# Altium PCB REL_IRF_MEZ_v2.PcbDoc
Units mm, origin at the board's own origin, x right, y up, seen from the top; angles counter-clockwise.
Board outline 27.97 x 22.89 mm, 2 copper layers (Top Layer, Bottom Layer); 9 components, 20 nets, 46 pads, 0 vias.
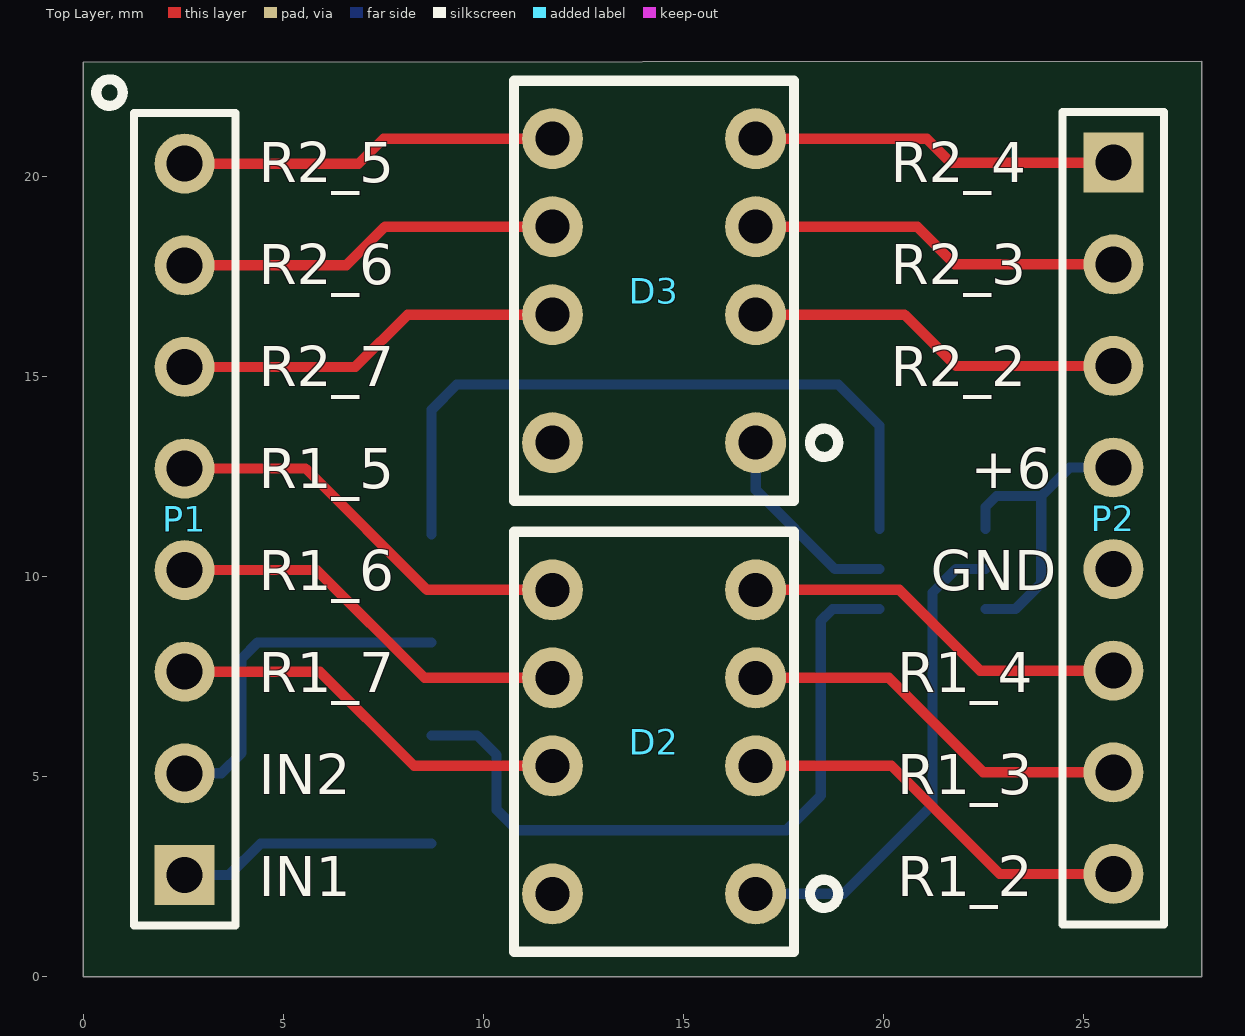
[diagram p0: Top Layer view]
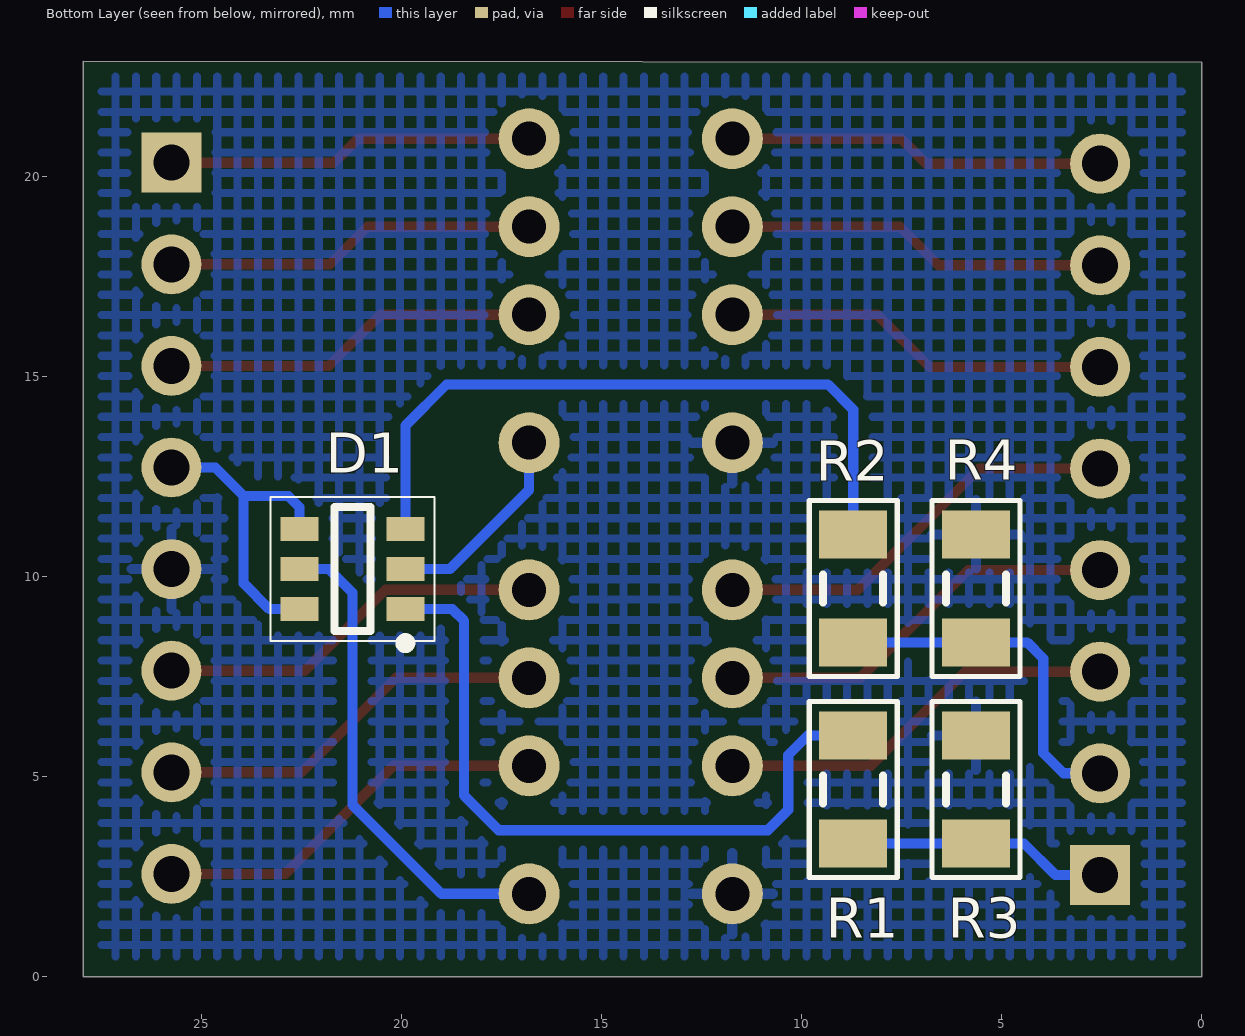
[diagram p1: Bottom Layer view, seen from below]
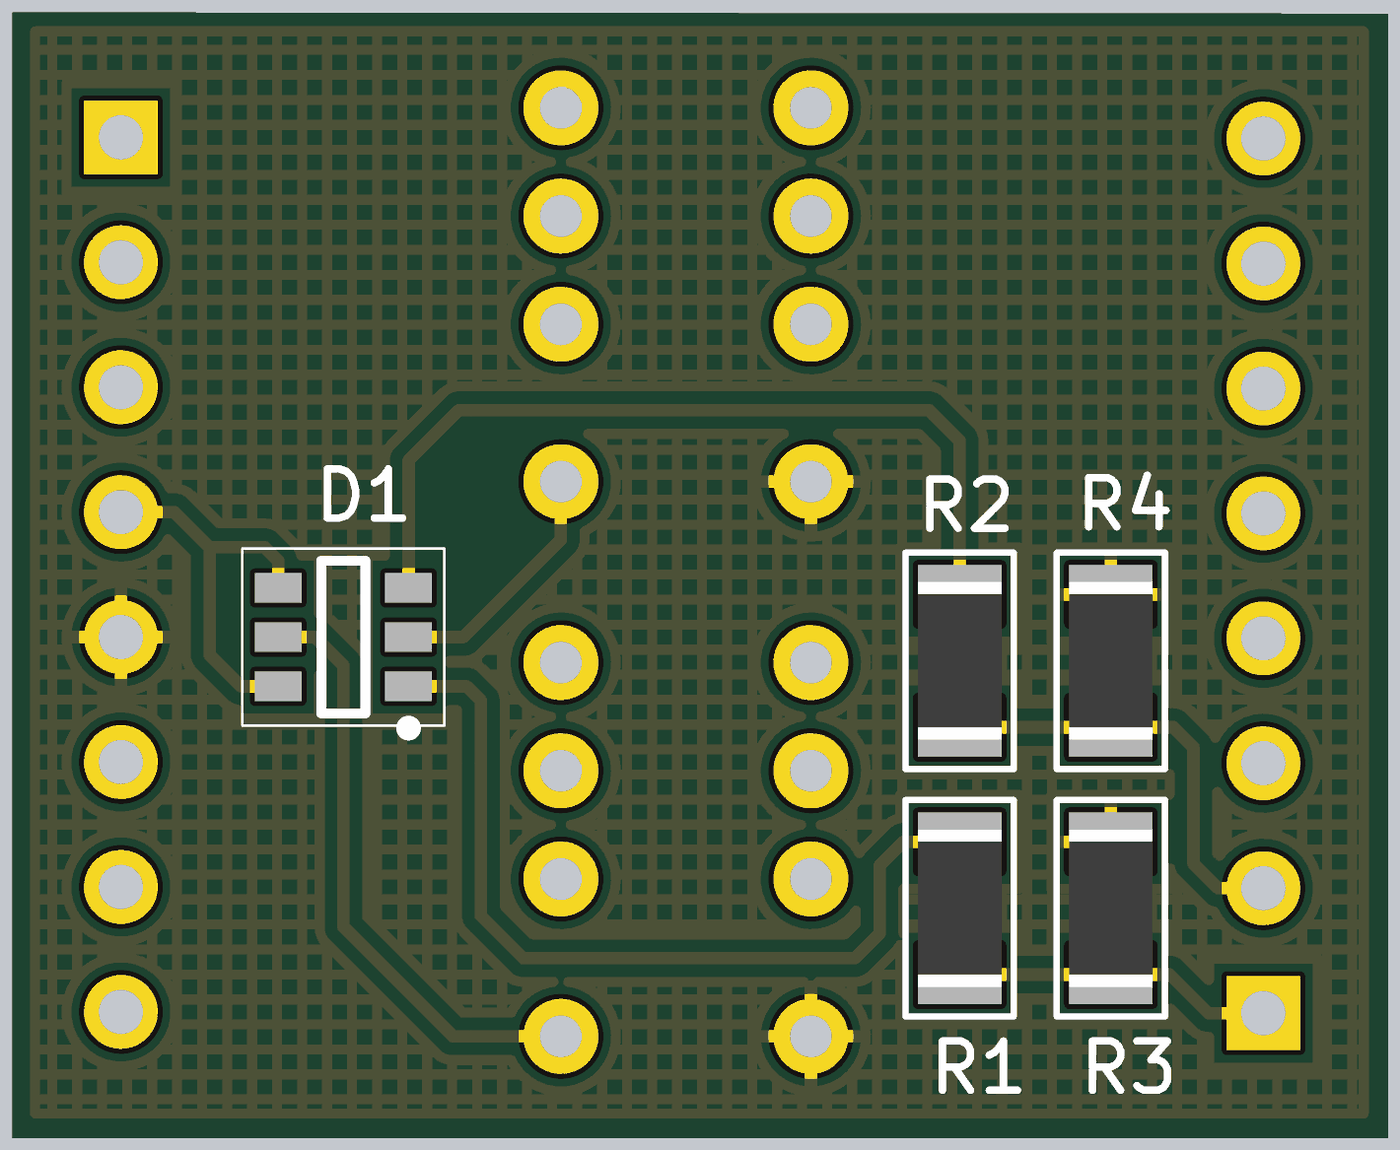
[diagram p2: 3D render of the assembled board from below, using the file's embedded part models]

## Layer stack, top to bottom
Top Solder: solder mask 0.0102, Solder Resist, Dk 3.5
Top Layer: signal copper 0.0356
Dielectric 1: dielectric 0.32, FR-4, Dk 4.8
Bottom Layer: signal copper 0.0356
Bottom Solder: solder mask 0.0102, Solder Resist, Dk 3.5

## Board outline
0,22.86 0,0 27.965,0 27.965,22.885

## Design rules (kind name [scope] priority, off if disabled: settings)
Clearance [All] p1: gap=0.254 ignorepadtopadclearanceinfootprint=FALSE except(0: Arc-Hole Track-Hole SMDPad-Hole THPad-Hole Via-Hole Fill-Hole Poly-Hole Region-Hole Text-Hole)
PolygonConnect [All] p1: connectstyle=Relief reliefconductorwidth=0.254 reliefentries=4 polygonreliefangle="90 Angle" airgapwidth=0.254
RoutingVias [All] p1: holewidth=0.711 width=1.27 viastyle="Through Hole" minholewidth=0.711 minwidth=1.27 maxholewidth=0.711 maxwidth=1.27
SolderMaskExpansion [All] p1: expansion=0.102
Width [All] p1: maxlimit=0.254 minlimit=0.254 preferedwidth=0.254
30 further rules are at their usual default settings.

## Components (designator, comment, footprint, x,y, rotation, side; value= is the part's Value field where it differs from the comment)
D1 "IRF5852PbF" IRF5852PbF 21.234,10.185 r0 bottom
D2 "HFD4 (IM03TS)" "HFD4 (IM03TS)" 14.275,5.867 r90 top
D3 "HFD4 (IM03TS)" "HFD4 (IM03TS)" 14.275,17.145 r90 top
P1 "Header 8" HDR1X8 2.54,2.54 r90 top
P2 "Header 8" HDR1X8 25.756,20.345 r270 top
R1 "240" RES_1206 8.712,4.674 r90 bottom
R2 "240" RES_1206 8.712,9.703 r90 bottom
R3 "1М" RES_1206 5.639,4.674 r90 bottom
R4 "1М" RES_1206 5.639,9.703 r270 bottom

## Footprints (in the part's own frame and the unit in brackets; to place one, negate y for a bottom-side part, rotate by r counter-clockwise, add the part's x,y. Pads: shape width x height; smd on the part's side, far side on the other; paste and mask are expansions set on the pad)
HDR1X8 [mm] "Connector; Header; 8 Position"
  rect 1.5x1.5 hole 0.9: 1(0,0)
  round 1.5 hole 0.9: 2(2.54,0) 3(5.08,0) 4(7.62,0) 5(10.16,0) 6(12.7,0) 7(15.24,0) 8(17.78,0)
  silkscreen extent -1.27,-1.27 19.05,1.27
"HFD4 (IM03TS)" [mm]
  round 1.524 hole 0.85: 1(-3.8,-2.54) 2(-0.6,-2.54) 3(1.6,-2.54) 4(3.8,-2.54) 5(3.8,2.54) 6(1.6,2.54) 7(-0.6,2.54) 8(-3.8,2.54)
  silkscreen extent -5.25,-4.6 5.25,3.5
IRF5852PbF [mm] "TSOP, 6-Leads, Body 3,00x1,50mm, Pitch 1,00mm, IPC Medium Density"
  rect 0.95x0.6 smd: 1(-1.325,1) 2(-1.325,0) 3(-1.325,-1) 4(1.325,-1) 5(1.325,0) 6(1.325,1)
  silkscreen extent -2.05,-1.8 2.05,1.97, body extent -0.85,-1.55 0.85,1.55, height 1.1
RES_1206 [mm]
  rect 1.2x1.7 smd: 1(-1.35,0) 2(1.35,0)
  silkscreen extent -2.2,-1.1 2.2,1.1, body extent -1.6,-0.85 1.6,0.85, height 0.6

## Part data
P1 P2: "Header, 8-Pin", LatestRevisionDate=17-Jul-2002, LatestRevisionNote="Re-released for DXP Platform.", Publisher="Altium Limited"
R1 R2 R3 R4: library part RES

## Nets (pads, with @x,y where several pads share a name; then routed paths per layer and width w, separated by ;. In a path a pad name is that pad's centre, name@x,y a point inside that pad or via, vN(x,y) a via of type N, cw(c..) or ccw(c..) an arc to the next point about the centre after c; other vN are vias at no path point)
+6: D1.4 D1.6 P2.4 | length 8
  Bottom Layer w0.254: D1.6 23.308,9.185 23.952,9.83 23.952,12.014 ; D1.4 22.559,11.739 22.835,12.014 23.952,12.014 ; P2.4 24.663,12.725 23.952,12.014
+6_R1: D1.5 D2.1 | length 12.2
  Bottom Layer w0.254: D2.1 19.009,2.067 21.234,4.293 21.234,9.601 21.819,10.185 D1.5
+6_R2: D1.2 D3.1 | length 5.1
  Bottom Layer w0.254: D3.1 16.815,12.167 18.796,10.185 D1.2
GND: D2.8 D3.8 P2.5 R3.2 R4.1
IN1: P1.1 R1.1 R3.1 | length 6.5
  Bottom Layer w0.254: P1.1 3.658,2.54 4.441,3.324 R3.1 R1.1
IN2: P1.2 R2.1 R4.2 | length 8.9
  Bottom Layer w0.254: P1.2 3.454,5.08 3.962,5.588 3.962,7.95 4.365,8.353 R4.2 R2.1
NetD1_1: D1.1 R1.2 | length 17.8
  Bottom Layer w0.254: R1.2 9.851,6.024 10.338,5.537 10.338,4.166 10.846,3.658 17.577,3.658 18.44,4.521 18.44,8.89 18.736,9.185 D1.1
NetD1_3: D1.3 R2.2 | length 17.6
  Bottom Layer w0.254: R2.2 8.712,14.173 9.339,14.8 18.88,14.8 19.909,13.771 D1.3
R1_2: D2.2 P2.8 | length 10.1
  Top Layer w0.254: D2.2 20.209,5.267 22.911,2.565 P2.8
R1_3: D2.3 P2.7 | length 9.9
  Top Layer w0.254: D2.3 20.142,7.467 22.504,5.105 P2.7
R1_4: D2.4 P2.6 | length 9.8
  Top Layer w0.254: D2.4 20.406,9.667 22.428,7.645 P2.6
R1_5: D2.5 P1.5 | length 10.5
  Top Layer w0.254: P1.5 5.563,12.7 8.595,9.667 D2.5
R1_6: D2.6 P1.4 | length 10.3
  Top Layer w0.254: P1.4 5.842,10.16 8.535,7.467 D2.6
R1_7: D2.7 P1.3 | length 10.2
  Top Layer w0.254: P1.3 5.918,7.62 8.271,5.267 D2.7
R2_2: D3.2 P2.3 | length 9.5
  Top Layer w0.254: D3.2 20.539,16.545 21.819,15.265 P2.3
R2_3: D3.3 P2.2 | length 9.3
  Top Layer w0.254: D3.3 20.854,18.745 21.793,17.805 P2.2
R2_4: D3.4 P2.1 | length 9.2
  Top Layer w0.254: D3.4 21.092,20.945 21.692,20.345 P2.1
R2_5: D3.5 P1.8 | length 9.5
  Top Layer w0.254: P1.8 6.883,20.32 7.508,20.945 D3.5
R2_6: D3.6 P1.7 | length 9.6
  Top Layer w0.254: P1.7 6.579,17.78 7.544,18.745 D3.6
R2_7: D3.7 P1.6 | length 9.7
  Top Layer w0.254: P1.6 6.807,15.24 8.112,16.545 D3.7

## Polygon pours and split planes (outlines as drawn)
no net on Top Layer "Top Layer-No Net" (solid, pour order 4): 0.864,22.504
GND on Bottom Layer (hatched 90Degree grid 0.508 track 0.203, remove dead copper, pour order 8): 0.5,0.5 27.5,0.5 27.5,22.5 0.5,22.5
no net on Bottom Layer (solid, pour order 6): 1.5,21.5

## Silkscreen, mask and mechanical layers (free items; w line width, h text height)
Top Overlay:
  circle w0.254: c0.66,22.098 r0.331
  text "R2_5" at 4.394,19.863 h1
  text "R2_4" at 20.193,19.863 h1
  text "R2_6" at 4.394,17.312 h1
  text "R2_3" at 20.193,17.312 h1
  text "R2_7" at 4.394,14.761 h1
  text "R2_2" at 20.193,14.761 h1
  text "R1_5" at 4.394,12.21 h1
  text "+6" at 22.192,12.21 h1
  text "R1_6" at 4.394,9.659 h1
  text "GND" at 21.193,9.659 h1
  text "R1_7" at 4.394,7.108 h1
  text "R1_4" at 20.36,7.108 h1
  text "IN2" at 4.394,4.557 h1
  text "R1_3" at 20.36,4.557 h1
  text "IN1" at 4.394,2.007 h1
  text "R1_2" at 20.36,2.007 h1
Mechanical 1:
  lines w0.254: 0,0 0,22.86 0.025,22.885 27.965,22.885 27.965,0 0,0